# Altium PCB PCB1.PcbDoc
Units mil, origin at the board's own origin, x right, y up, seen from the top; angles counter-clockwise.
Board outline 6000 x 4000 mil, 2 copper layers (Top Layer, Bottom Layer); 44 components, 28 nets, 183 pads, 9 vias.
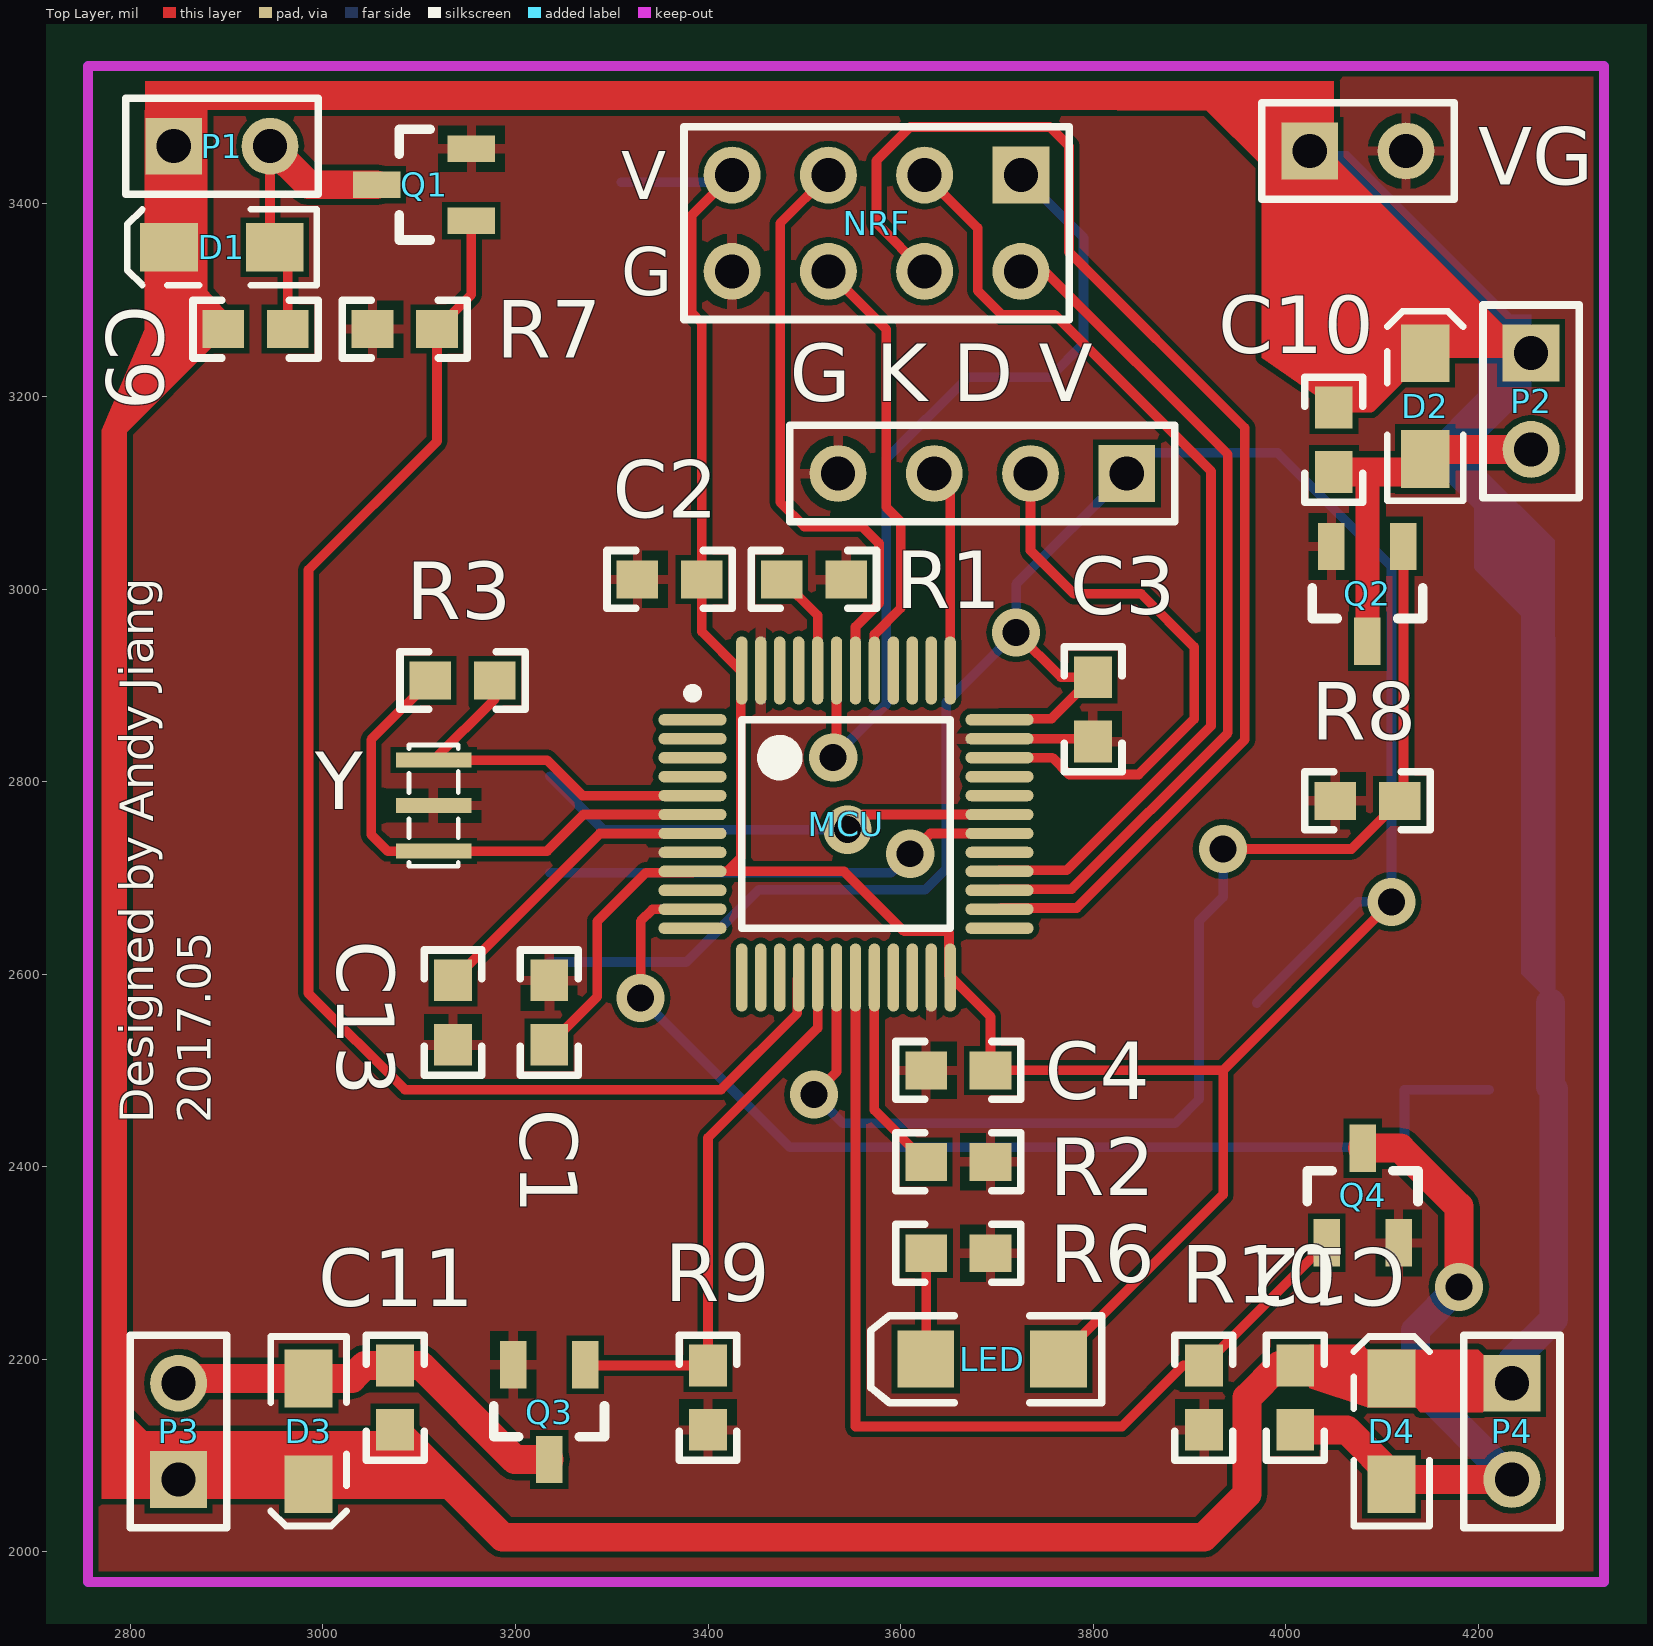
[diagram p0: Top Layer view]
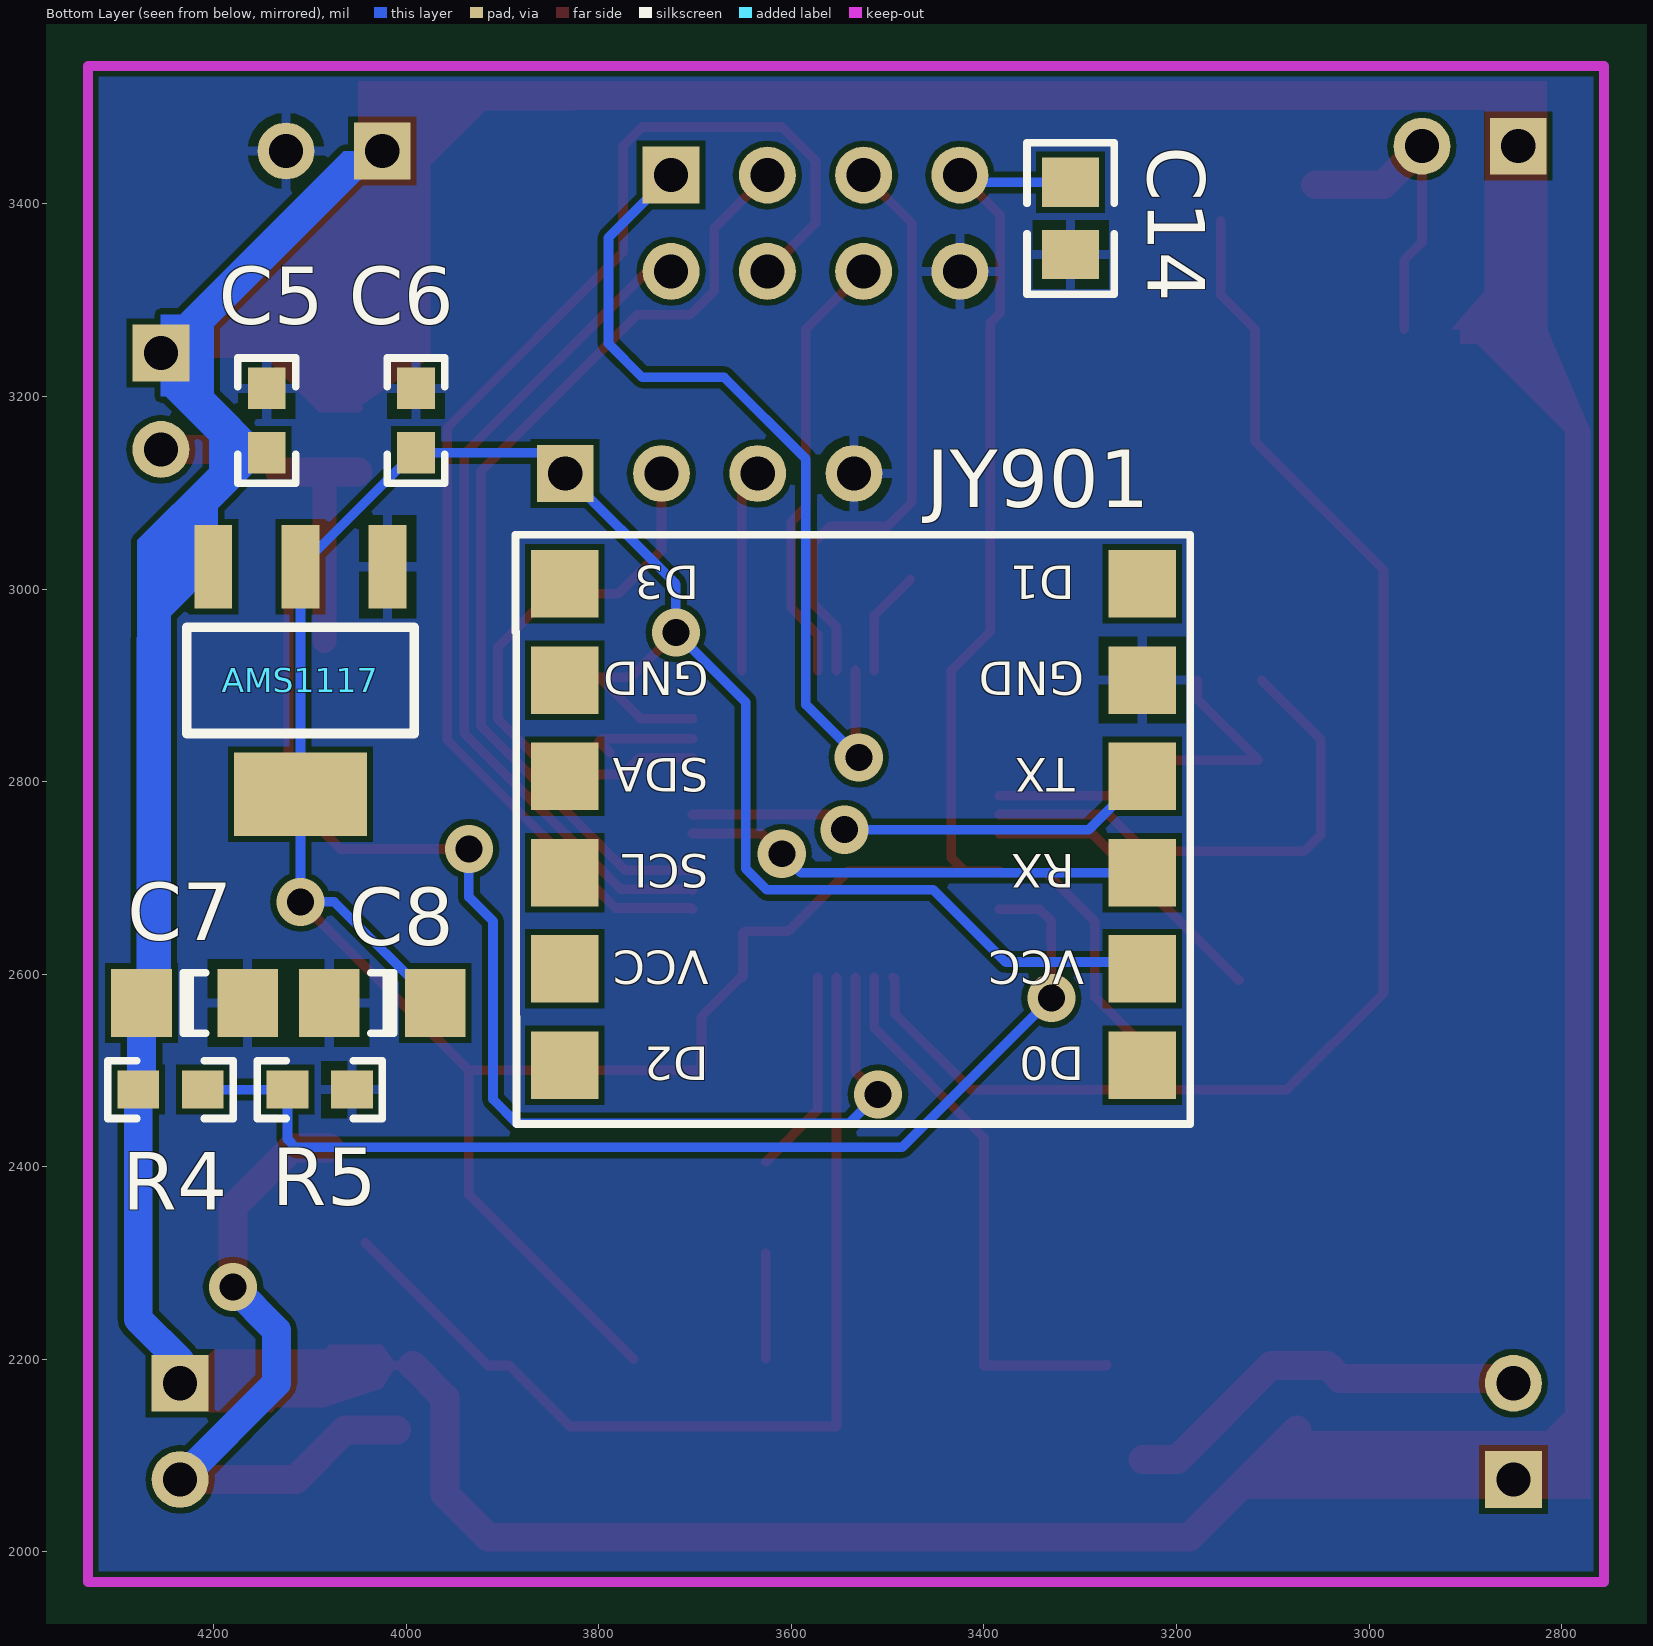
[diagram p1: Bottom Layer view, seen from below]

## Layer stack, top to bottom
Top Solder: solder mask 0.4, Solder Resist, Dk 3.5
Top Layer: signal copper 1.4
Dielectric 1: dielectric 12.6, FR-4, Dk 4.8
Bottom Layer: signal copper 1.4
Bottom Solder: solder mask 0.4, Solder Resist, Dk 3.5

## Board outline
1000,1000 7000,1000 7000,5000 1000,5000

## Design rules (kind name [scope] priority, off if disabled: settings)
Clearance [All] p1: gap=6
PolygonConnect [All] p1: connectstyle=Relief reliefconductorwidth=10 reliefentries=4 polygonreliefangle="90 Angle" airgapwidth=10
RoutingVias [All] p1: holewidth=28 width=50 viastyle="Through Hole" minholewidth=28 minwidth=50 maxholewidth=28 maxwidth=50
SolderMaskExpansion [All] p1: expansion=4
Width [All] p1: maxlimit=30 minlimit=10 preferedwidth=10
30 further rules are at their usual default settings.

## Components (designator, comment, footprint, x,y, rotation, side; value= is the part's Value field where it differs from the comment)
AMS1117 "" LC-SOT-223 4110,2905 r90 bottom
C1 "CAP" C1608[0603]N 3235,2560 r270 top
C2 "CAP" C1608[0603]N 3360,3010 r0 top
C3 "CAP" C1608[0603]N 3800,2875 r90 top
C4 "CAP" C1608[0603]N 3660,2500 r0 top
C5 "cap smd" C1608[0603]N 4145,3175 r90 bottom
C6 "cap smd" C1608[0603]N 3990,3175 r90 bottom
C7 "Cap" C1206 4220,2570 r180 bottom
C8 "Cap" C1206 4025,2570 r0 bottom
C9 "cap smd" C1608[0603]N 2930,3270 r0 top
C10 "cap smd" C1608[0603]N 4050,3155 r270 top
C11 "cap smd" C1608[0603]N 3075,2160 r90 top
C12 "cap smd" C1608[0603]N 4010,2160 r270 top
C13 "cap smd" C1608[0603]N 3135,2560 r270 top
C14 "cap smd" C2012[0805]N 3310,3385 r270 bottom
D1 "Diode" D3216[1206] 2895,3355 r180 top
D2 "Diode" D3216[1206] 4145,3190 r90 top
D3 "Diode" D3216[1206] 2985,2125 r270 top
D4 "Diode" D3216[1206] 4110,2125 r90 top
"G K D V" "Header 4" HDR1X4 3835,3120 r180 top (schematic designator "V D C G")
JY901 "IMU" JY-901 3235,3005 r0 bottom
LED "LED" 3.2X1.6X1.1 3695,2200 r180 top
MCU "STM32F103C8T6" STM-LQFP48_N 3543.31,2755.91 r0 top
NRF "Header 4X2" HDR2X4 3725,3430 r180 top
P1 "MOTOR1" HDR1X2 2845,3460 r0 top
P2 "MOTOR1" HDR1X2 4255,3245 r270 top
P3 "MOTOR1" HDR1X2 2850,2075 r90 top
P4 "MOTOR1" HDR1X2 4235,2175 r270 top
Q1 "NMOS-2" LC-SOT-23 3105,3420 r0 top
Q2 "NMOS-2" LC-SOT-23 4085,2995 r90 top
Q3 "NMOS-2" LC-SOT-23 3235,2145 r90 top
Q4 "NMOS-2" LC-SOT-23 4080,2370 r270 top
R1 "RES1" R1608[0603] 3510,3010 r180 top
R2 "RES1" R1608[0603] 3660,2405 r180 top
R3 "RES1" R1608[0603] 3145,2905 r0 top
R4 "RES1" R1608[0603] 4245,2480 r180 bottom
R5 "RES1" R1608[0603] 4090,2480 r180 bottom
R6 "RES1" R1608[0603] 3660,2310 r0 top
R7 "RES1" R1608[0603] 3085,3270 r0 top
R8 "RES1" R1608[0603] 4085,2780 r0 top
R9 "RES1" R1608[0603] 3400,2160 r90 top
R10 "RES1" R1608[0603] 3915,2160 r90 top
VG "BATTERY" HDR1X2 4025,3455 r0 top
Y "8M" Crystal_C 3115,2775 r270 top

## Footprints (in the part's own frame and the unit in brackets; to place one, negate y for a bottom-side part, rotate by r counter-clockwise, add the part's x,y. Pads: shape width x height; smd on the part's side, far side on the other; paste and mask are expansions set on the pad)
3.2X1.6X1.1 [mm] "SMT LED; 2 Flat Leads"
  rect 1.5x1.5 smd: 1(-1.75,0) 2(1.75,0)
  silkscreen extent -2.9,-1.15 3.2,1.15
C1206 [mm] "Chip Capacitor; Body 3.2 x 1.6 mm (LxW typ)"
  rect 1.6x1.8 smd: 1(-1.4,0) 2(1.4,0)
  silkscreen extent -0.3,-0.8 0.3,0.8
C1608[0603]N [mm] "Chip Capacitor; Body 1.6 x 0.8 mm (LxW typ)"
  rect 1.1x1 smd: 1(-0.85,0) 2(0.85,0)
  silkscreen extent -1.65,-0.76 1.65,0.76, body extent -0.8,-0.4 0.8,0.4, height 0.8
C2012[0805]N [mm]
  rect 1.3x1.5 smd: 1(-0.95,0) 2(0.95,0)
  silkscreen extent -2,-1.15 2,1.15, body extent -1,-0.6 1,0.6, height 1.2
Crystal_C [mm] "含电容晶振，村田 3.2X1.3mm"
  rect 0.4x2 smd: 1(-1.2,0) 2(0,0) 3(1.2,0)
  silkscreen extent -1.6,-0.65 1.6,0.65
D3216[1206] [mil]
  rect 60x50 smd: 1(-55,0) 2(55,0)
  silkscreen extent -98,-39 98,39, body extent -63,-31 63,31, height 63
HDR1X2 [mm] "Connector; Header; 2 Position"
  rect 1.5x1.5 hole 0.9: 1(0,0)
  round 1.5 hole 0.9: 2(2.54,0)
  silkscreen extent -1.27,-1.27 3.81,1.27
HDR1X4 [mm] "Connector; Header; 4 Position"
  rect 1.5x1.5 hole 0.9: 1(0,0)
  round 1.5 hole 0.9: 2(2.54,0) 3(5.08,0) 4(7.62,0)
  silkscreen extent -1.27,-1.27 8.89,1.27
HDR2X4 [mm] "Connector; Header; 4x2 Position"
  rect 1.5x1.5 hole 0.9: 1(0,0)
  round 1.5 hole 0.9: 2(0,2.54) 3(2.54,0) 4(2.54,2.54) 5(5.08,0) 6(5.08,2.54) 7(7.62,0) 8(7.62,2.54)
  silkscreen extent -1.27,-1.27 8.89,3.81
JY-901 [mil]
  rect 70x70 smd: 1(0.63,499.63) 2(0.63,399.63) 3(0.63,299.63) 4(0.63,199.63) 5(0.63,99.63) 6(0.63,-0.37) 7(600.63,-0.37) 8(600.63,99.63) 9(600.63,199.63) 10(600.63,299.63) 11(600.63,399.63) 12(600.63,499.63)
  silkscreen extent -49,-51 652,561
LC-SOT-23 [mm]
  rect 1.25x0.7 smd: 1(1.25,-0.95) 1(1.25,-0.95) 1(1.25,-0.95) 2(1.25,0.95) 2(1.25,0.95) 2(1.25,0.95) 3(-1.25,0) 3(-1.25,0) 3(-1.25,0)
  silkscreen extent -0.65,-1.46 0.17,1.46, body extent -1.5,-1.5 1.5,1.5, height 1.3
LC-SOT-223 [mm]
  rect 2.2x1 smd: 1(3,-2.3) 2(3,0) 3(3,2.3)
  rect 2.2x3.5 smd: 2(-3,0)
  silkscreen extent -1.4,-3 1.4,3, body extent -3.49,-3.24 3.49,3.24, height 1.64
R1608[0603] [mm] "Chip Capacitor; Body 1.6 x 0.8 mm (LxW typ)"
  rect 1.1x1 smd: 1(-0.85,0) 2(0.85,0)
  silkscreen extent -1.65,-0.76 1.65,0.76, body extent -0.8,-0.4 0.8,0.4, height 0.5
STM-LQFP48_N [mm] "QFP, 48-Leads, Body 7x7mm, Pitch 0.5mm, IPC Medium Density"
  oval 1.8x0.3 smd: 1(-4.05,2.75) 2(-4.05,2.25) 3(-4.05,1.75) 4(-4.05,1.25) 5(-4.05,0.75) 6(-4.05,0.25) 7(-4.05,-0.25) 8(-4.05,-0.75) 9(-4.05,-1.25) 10(-4.05,-1.75) 11(-4.05,-2.25) 12(-4.05,-2.75) 25(4.05,-2.75) 26(4.05,-2.25) 27(4.05,-1.75) 28(4.05,-1.25) 29(4.05,-0.75) 30(4.05,-0.25) 31(4.05,0.25) 32(4.05,0.75) 33(4.05,1.25) 34(4.05,1.75) 35(4.05,2.25) 36(4.05,2.75)
  oval 0.3x1.8 smd: 13(-2.75,-4.05) 14(-2.25,-4.05) 15(-1.75,-4.05) 16(-1.25,-4.05) 17(-0.75,-4.05) 18(-0.25,-4.05) 19(0.25,-4.05) 20(0.75,-4.05) 21(1.25,-4.05) 22(1.75,-4.05) 23(2.25,-4.05) 24(2.75,-4.05) 37(2.75,4.05) 38(2.25,4.05) 39(1.75,4.05) 40(1.25,4.05) 41(0.75,4.05) 42(0.25,4.05) 43(-0.25,4.05) 44(-0.75,4.05) 45(-1.25,4.05) 46(-1.75,4.05) 47(-2.25,4.05) 48(-2.75,4.05)
  silkscreen extent -4.17,-2.75 2.75,3.57, body extent -3.5,-3.5 3.5,3.5, height 1.6

## Part data
AMS1117: library part LC-SOT-233
C1 C2 C3 C4: "贴片无极性电容"
C5 C6 C9 C10 C11 C12 C13 C14: library part CAP, "贴片无极性电容"
C7 C8: library part "Cap Pol S", "贴片极性电容"
D1 D2 D3 D4: "Default Diode"
"G K D V": "Header, 4-Pin"
JY901: library part JY901
LED: library part LED2, "Typical RED, GREEN, YELLOW, AMBER GaAs LED"
MCU: "ARM Cortex-M3 32-bit MCU, 64 KB Flash, 20 KB Internal RAM, 37 I/Os, 48-pin LQFP, -40 to 85 degC, Tray"
NRF: "Header, 4-Pin, Dual row"
P1 P2 P3 P4 VG: library part "Header 2", "Header, 2-Pin"
Q1 Q2 Q3 Q4: "N-Channel Power MOSFET"
Y: library part CRYSTAL_C, "Crystal"

## Via types
v1: diameter 50, hole 28, Top Layer to Bottom Layer, 9 vias

## Nets (pads, with @x,y where several pads share a name; then routed paths per layer and width w, separated by ;. In a path a pad name is that pad's centre, name@x,y a point inside that pad or via, vN(x,y) a via of type N, cw(c..) or ccw(c..) an arc to the next point about the centre after c; other vN are vias at no path point)
AD_BAT: MCU.11 R4.2 R5.1 | length 1139.7
  Top Layer w10: v1(3330,2575) 3330,2655 3342.32,2667.32 MCU.11
  Bottom Layer w10: v1(3330,2575) 3485,2420 4115,2420 4123.46,2428.46 R5.1 R4.2
BAT: AMS1117.3 C5.1 C7.1 C9.1 C10.1 C11.1 C12.1 D1.2 D2.2 D3.2 D4.2 P1.1 P2.1 P3.1 P4.1 R4.1 VG.1 | length 4519.4
  Top Layer w10: P1.1 2845,3321.54 C9.1 2791.54,3165 2791.54,2133.46 P3.1 2855,2070 D3.2 3018.46,2070 C11.1 ; C12.1@3993.46,2193.46 C12.1 ; C10.1 4088.46,3188.46 D2.2 P2.1
  Top Layer w30: C11.1 3186.54,2015 3915,2015 3960,2060 3960,2160 C12.1@3993.46,2193.46
  Bottom Layer w10: VG.1 4205,3275 4205,3201.54 C5.1 4200.55,3085.98 AMS1117.3 4275.12,2948.54 C7.1 ; R4.1@4275.12,2483.35 R4.1
  Bottom Layer w30: P4.1 4235,2198.07 4278.46,2241.54 R4.1 ; R4.1@4275.12,2483.35 C7.1
BOOT0: MCU.44 R1.2 | length 110.1
  Top Layer w10: R1.2 3513.78,2972.76 MCU.44
BOOT1: MCU.20 R2.2 | length 213.7
  Top Layer w10: MCU.20 3572.83,2458.7 R2.2
CE: MCU.41 NRF.6 | length 457
  Top Layer w10: NRF.6 3585,3270 3585,3085 3600,3070 3600,2980 3572.83,2952.83 MCU.41
CLK: "G K D V.3" MCU.37 | length 211.5
  Top Layer w10: 3635,3120 3651.57,3103.43 MCU.37
CSN: MCU.42 NRF.5 | length 623.1
  Top Layer w10: NRF.5 3475,3380 3475,3090 3500,3065 3560,3065 3577.62,3047.38 3577.62,2985.14 3553.15,2960.67 MCU.42
DIO: "G K D V.2" MCU.34 | length 599.7
  Top Layer w10: MCU.34 3757.72,2824.8 3775.14,2807.38 3847.38,2807.38 3905,2865 3905,2940 3850,2995 3780,2995 3735,3040 3735,3120
GND: "G K D V.4" AMS1117.1 C1.1 C2.1 C3.1 C4.1 C5.2 C6.2 C7.2 C8.2 C13.2 C14.2 JY901.5 MCU.8 MCU.23 MCU.35 MCU.47 NRF.8 Q1.2 Q2.2 Q3.2 Q4.2 R1.1 R2.1 R5.2 R6.2 R7.1 R8.1 R9.1 R10.1 VG.2 Y.2 | length 114.8
  Top Layer w10: MCU.35 3797.05,2844.49 C3.1 C3.1@3788.46,2830
IMURX: JY901.3 MCU.30 | length 483.9
  Top Layer w10: v1(3610,2725) 3630.75,2745.75 ; 3630.75,2746.06 MCU.30
  Bottom Layer w10: JY901.3 3590.37,2705.37 v1(3610,2725)
IMUTX: JY901.4 MCU.31 | length 496.6
  Top Layer w10: v1(3545,2750) 3560.75,2765.75 MCU.31
  Bottom Layer w10: JY901.4 3291,2750 v1(3545,2750)
IRQ: MCU.43 NRF.1 | length 881.2
  Top Layer w10: v1(3530,2825) 3533.46,2828.46 MCU.43
  Bottom Layer w10: v1(3530,2825) 3585,2880 3585,3135 3670,3220 3755,3220 3790,3255 3790,3365 NRF.1
MISO: MCU.27 NRF.2 | length 888.2
  Top Layer w10: MCU.27 3704.04,2688.29 3777.78,2688.29 3940,2850.5 3940,3140 3750,3330 NRF.2
MOSI: MCU.28 NRF.3 | length 1010.8
  Top Layer w10: NRF.3 3680,3375 3680,3310 3705,3285 3760,3285 3922.5,3122.5 3922.5,2857.75 3772.72,2707.97 3702.76,2707.97 MCU.28
NetC9_2: C9.2 D1.1 P1.2 Q1.3 | length 325
  Top Layer w10: P1.2 2945,3360 D1.1 2963.46,3341.54 C9.2
  Top Layer w30: P1.2 2985,3420 Q1.3@3055.79,3420
NetC10_2: C10.2 D2.1 P2.2 Q2.3 | length 390.5
  Top Layer w10: D2.1@4131.54,3121.54 D2.1 D2.1@4155,3145
  Top Layer w25: Q2.3@4085,2945.79 4085,3121.54
  Top Layer w30: C10.2 4085,3121.54 D2.1@4131.54,3121.54 ; D2.1@4155,3145 P2.2
NetC11_2: C11.2 D3.1 P3.2 Q3.3 | length 433.1
  Top Layer w10: P3.2 P3.2@2855,2180
  Top Layer w30: P3.2@2855,2180 D3.1 3030,2180 3043.46,2193.46 C11.2 3101.54,2193.46 3199.21,2095.79 Q3.3@3235,2095.79
NetC12_2: C12.2 D4.1 P4.2 Q4.3 | length 715
  Top Layer w30: C12.2 4063.46,2126.54 4115,2075 P4.2 ; Q4.3@4080,2419.21 4119.21,2419.21 4180,2358.43 v1(4180,2275)
  Bottom Layer w30: v1(4180,2275) 4135,2230 4135,2175 P4.2
NetC13_1: C13.1 MCU.7 | length 312.1
  Top Layer w10: C13.1 3287.6,2746.06 MCU.7
NetLED_2: LED.2 R6.1 | length 109.6
  Top Layer w10: LED.2@3626.54,2200.43 R6.1
NetMCU_5: MCU.5 R3.2 Y.1 | length 393.1
  Top Layer w10: R3.2 3178.46,2885.71 Y.1 3232.76,2822.24 3269.57,2785.43 MCU.5
NetMCU_6: MCU.6 R3.1 Y.3 | length 542.2
  Top Layer w10: R3.1 3050,2843.46 3050,2745 3067.24,2727.76 Y.3 3232.76,2727.76 3270.75,2765.75 MCU.6
PWM1: MCU.16 Q1.1 R7.2 | length 1492.5
  Top Layer w10: Q1.1@3154.21,3382.6 3154.21,3305.75 R7.2 3118.46,3153.46 2985,3020 2985,2580 3085,2480 3413.51,2480 3492.82,2559.31 3492.82,2595.18 MCU.16
PWM2: MCU.17 Q3.1 R9.2 | length 578
  Top Layer w10: Q3.1@3272.4,2194.21 3273.15,2193.46 R9.2 3400,2430 3513.78,2543.78 MCU.17
PWM3: MCU.18 Q2.1 R8.2 | length 1294.3
  Top Layer w10: v1(3510,2475) 3533.46,2498.46 MCU.18 ; v1(3935,2730) 4068.46,2730 R8.2 4122.4,2783.94 Q2.1@4122.4,3044.21
  Bottom Layer w10: v1(3510,2475) 3540,2445 3885,2445 3910,2470 3910,2655 3935,2680 v1(3935,2730)
PWM4: MCU.19 Q4.1 R10.2 | length 1034.9
  Top Layer w10: MCU.19 3553.15,2130 3830,2130 3893.46,2193.46 R10.2 4042.32,2320.79 Q4.1@4042.6,2320.79
SCK: MCU.26 NRF.4 | length 1378.4
  Top Layer w10: NRF.4 3575,3380 3575,3445 3610,3480 3755,3480 3775,3460 3775,3350 3957.5,3167.5 3957.5,2843.25 3782.85,2668.6 3704.04,2668.6 MCU.26
VCC: "G K D V.1" AMS1117.2 C1.2 C2.2 C3.2 C4.2 C6.1 C8.1 C14.1 JY901.2 LED.1 MCU.9 MCU.24 MCU.36 MCU.48 NRF.7 | length 4493.5
  Top Layer w10: C1.2 3285,2576.54 3285,2655 3335.41,2705.41 3383.86,2705.41 MCU.9 3541.34,2706.69 3603.64,2644.39 3648.59,2644.39 3650.3,2642.69 3650.3,2597.74 MCU.24 ; 3421.01,2707.97 3433.82,2720.78 3433.82,2915.35 3393.46,2955.71 C2.2 3393.46,3276.54 3382.97,3287.03 3382.97,3387.97 NRF.7 ; MCU.24@3652.8,2596.46 3693.46,2555.79 C4.2 3935,2500 ; MCU.36@3702.76,2865.39 3756.93,2865.39 C3.2 3766.54,2908.46 v1(3720,2955) ; LED.1 3935,2371.1 3935,2500 ; v1(4110,2675) 3935,2500
  Bottom Layer w10: JY901.2 3235.63,2612.5 3377.5,2612.5 3452.5,2687.5 3625.53,2687.5 3647.5,2709.47 3647.5,2882.5 v1(3720,2955) 3720,3005 3835,3120 3856.54,3141.54 C6.1 3991.57,3141.54 4110,3023.11 4110,2786.89 v1(4110,2675) 4074.88,2675 C8.1 ; C14.1 3417.4,3422.4 NRF.7
pads on no net: JY901.1 JY901.6 JY901.7 JY901.8 JY901.9 JY901.10 JY901.11 JY901.12 MCU.1 MCU.2 MCU.3 MCU.4 MCU.10 MCU.12 MCU.13 MCU.14 MCU.15 MCU.21 MCU.22 MCU.25 MCU.29 MCU.32 MCU.33 MCU.38 MCU.39 MCU.40 MCU.45 MCU.46

## Polygon pours and split planes (outlines as drawn)
GND on Top Layer "GND_L01_P036" (solid, remove dead copper, pour order 36): 2755.91,3543.31 4330.71,3543.31 4330.71,1968.5 2755.91,1968.5
GND on Bottom Layer "GND_L02_P038" (solid, remove dead copper, pour order 38): 2755.91,3543.31 4316.69,3543.31 4320,3540 4330.71,3529.29 4330.71,1968.5 2755.91,1968.5

## Keep-outs
Keep-Out Layer:
  lines w10: 2755.91,1968.5 4330.71,1968.5 4330.71,3543.31 2755.91,3543.31 2755.91,1968.5

## Other copper
Top Layer:
  rectangle net BAT: 2770,2175 2791.54,3165
  rectangle net BAT: 2815,3497.5 3825,3527.5
  region net BAT: 2850,2125 2850,2055 3130,2055 3060,2125
  region net BAT: 4010,2193.46 4025,2215 4080,2215 4085,2210 4200,2210 4235,2175 4205,2145 4140,2145 4135,2150 4085,2150 4025,2170
  region net BAT: 2770,3165 2815,3270 2880,3270 2896.54,3270 2905,3270 2905,3255 2881.54,3255 2791.54,3165
  region net BAT: 2791.54,2175 2770,2175 2770,2055 2850,2055 2850,2125 2816.54,2125 2791.54,2150
  region net BAT: 2815,3497.5 2815,3330 2815,3270 2915,3270 2880,3310 2880,3500
  region net BAT: 3975,3440 3917.5,3497.5 3825,3497.5 3825,3527.5 4050,3527.5 4050,3460 4045,3455 3990,3455
  region net BAT: 4050,3188.46 4088.46,3188.46 4145,3245 4255,3245 4045,3455 3990,3455 3975,3440 3975,3240
Bottom Layer:
  region net BAT: 4275.12,2948.54 4275.12,2570 4245,2600.12 4245,2978.66
  region net BAT: 4205,3240 4250,3240 4255,3245 4255,3200 4250,3200 4205,3155 4205,3125 4279.33,3050.67 4279.33,2944.33 4200.55,3023.11 4200.55,3085.98 4145,3141.54 4205,3201.54
  region net BAT: 4025,3455 4205,3275 4205,3240 4250,3240 4255,3245 4255,3285 4235,3285 4065,3455

## Silkscreen, mask and mechanical layers (free items; w line width, h text height)
Top Overlay:
  text "Designed by Andy Jiang / 2017.05" at 2895,2445 h60 r90

## Text inside footprints (layer, text, board x,y; h text height)
JY901: Bottom Overlay "D3" at 3695.63,3024.37 h35 r180; Bottom Overlay "D2" at 3685.63,2524.37 h35 r180; Bottom Overlay "D1" at 3305.63,3024.37 h35 r180; Bottom Overlay "D0" at 3295.63,2524.37 h35 r180; Bottom Overlay "SCL" at 3685.63,2724.37 h35 r180; Bottom Overlay "SDA" at 3685.63,2824.37 h35 r180; Bottom Overlay "TX" at 3305.63,2824.37 h35 r180; Bottom Overlay "RX" at 3305.63,2724.37 h35 r180; Bottom Overlay "GND" at 3685.63,2924.37 h35 r180; Bottom Overlay "GND" at 3295.63,2924.37 h35 r180; Bottom Overlay "VCC" at 3685.63,2624.37 h35 r180; Bottom Overlay "VCC" at 3295.63,2624.37 h35 r180
NRF: Top Overlay "G" at 3310,3305 h50; Top Overlay "V" at 3310,3405 h50